# Altium PCB 单管放大电路.PcbDoc
Units mil, origin at the board's own origin, x right, y up, seen from the top; angles counter-clockwise.
Board outline 1985 x 1375 mil, 2 copper layers (Top Layer, Bottom Layer); 11 components, 8 nets, 23 pads, 0 vias.
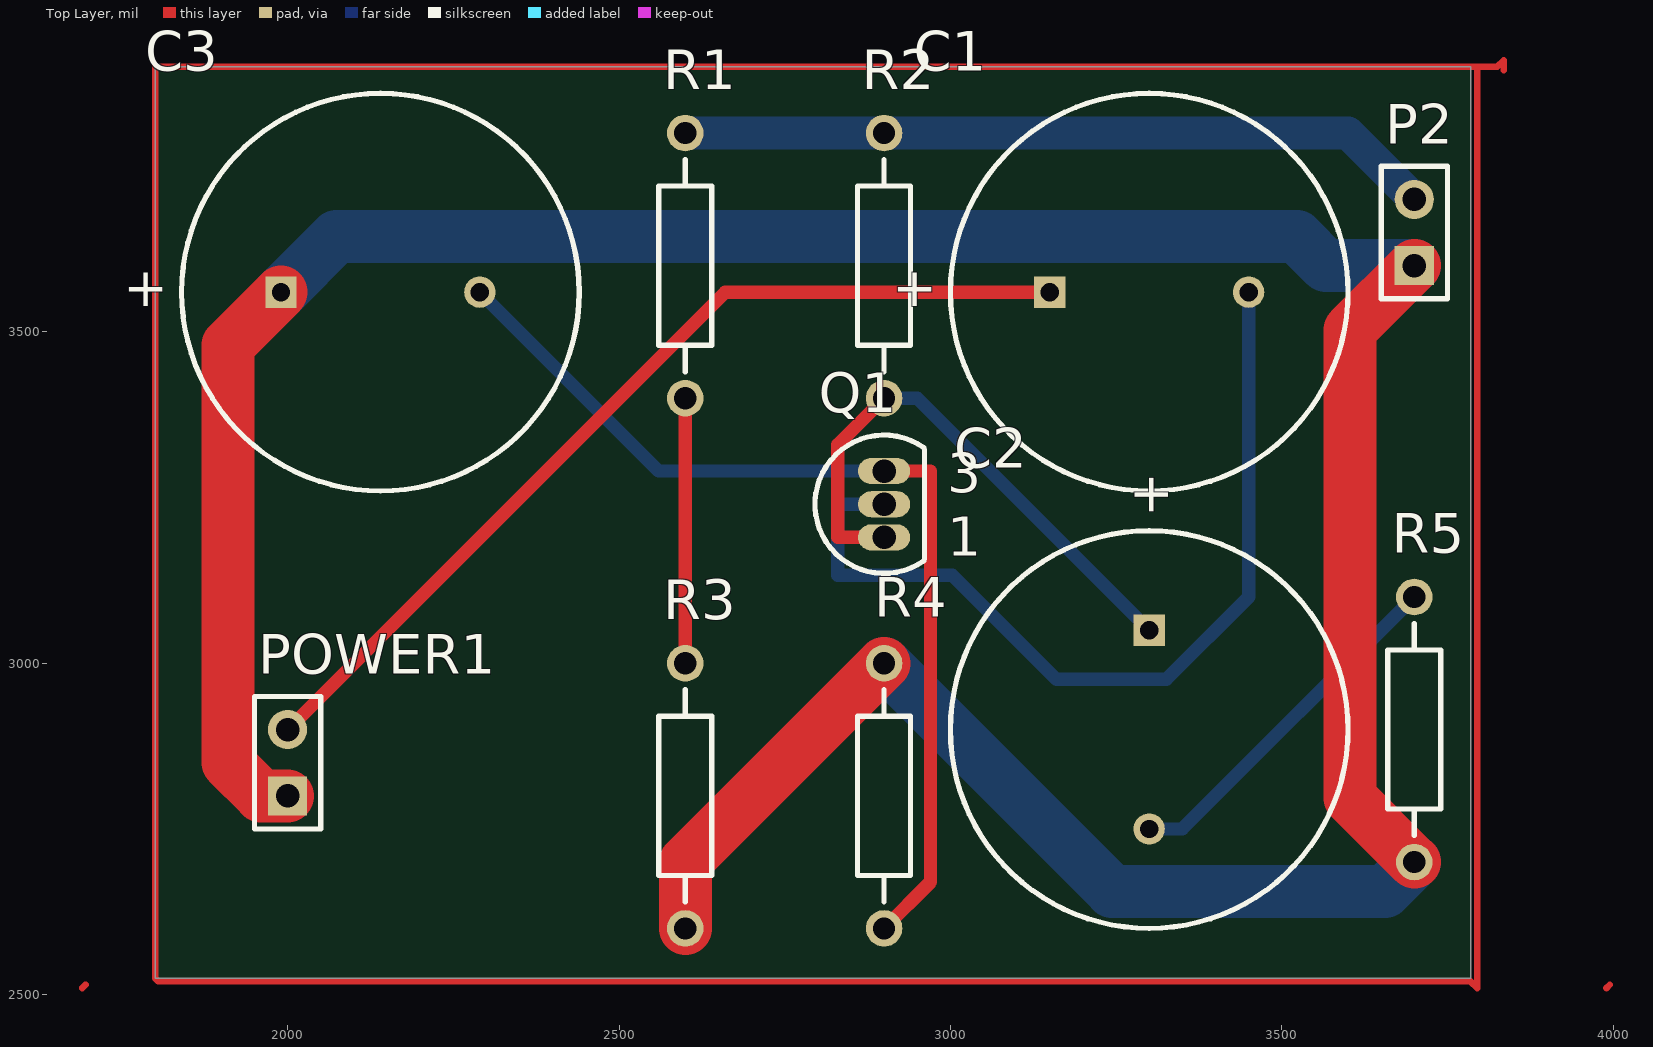
[diagram p0: Top Layer view]
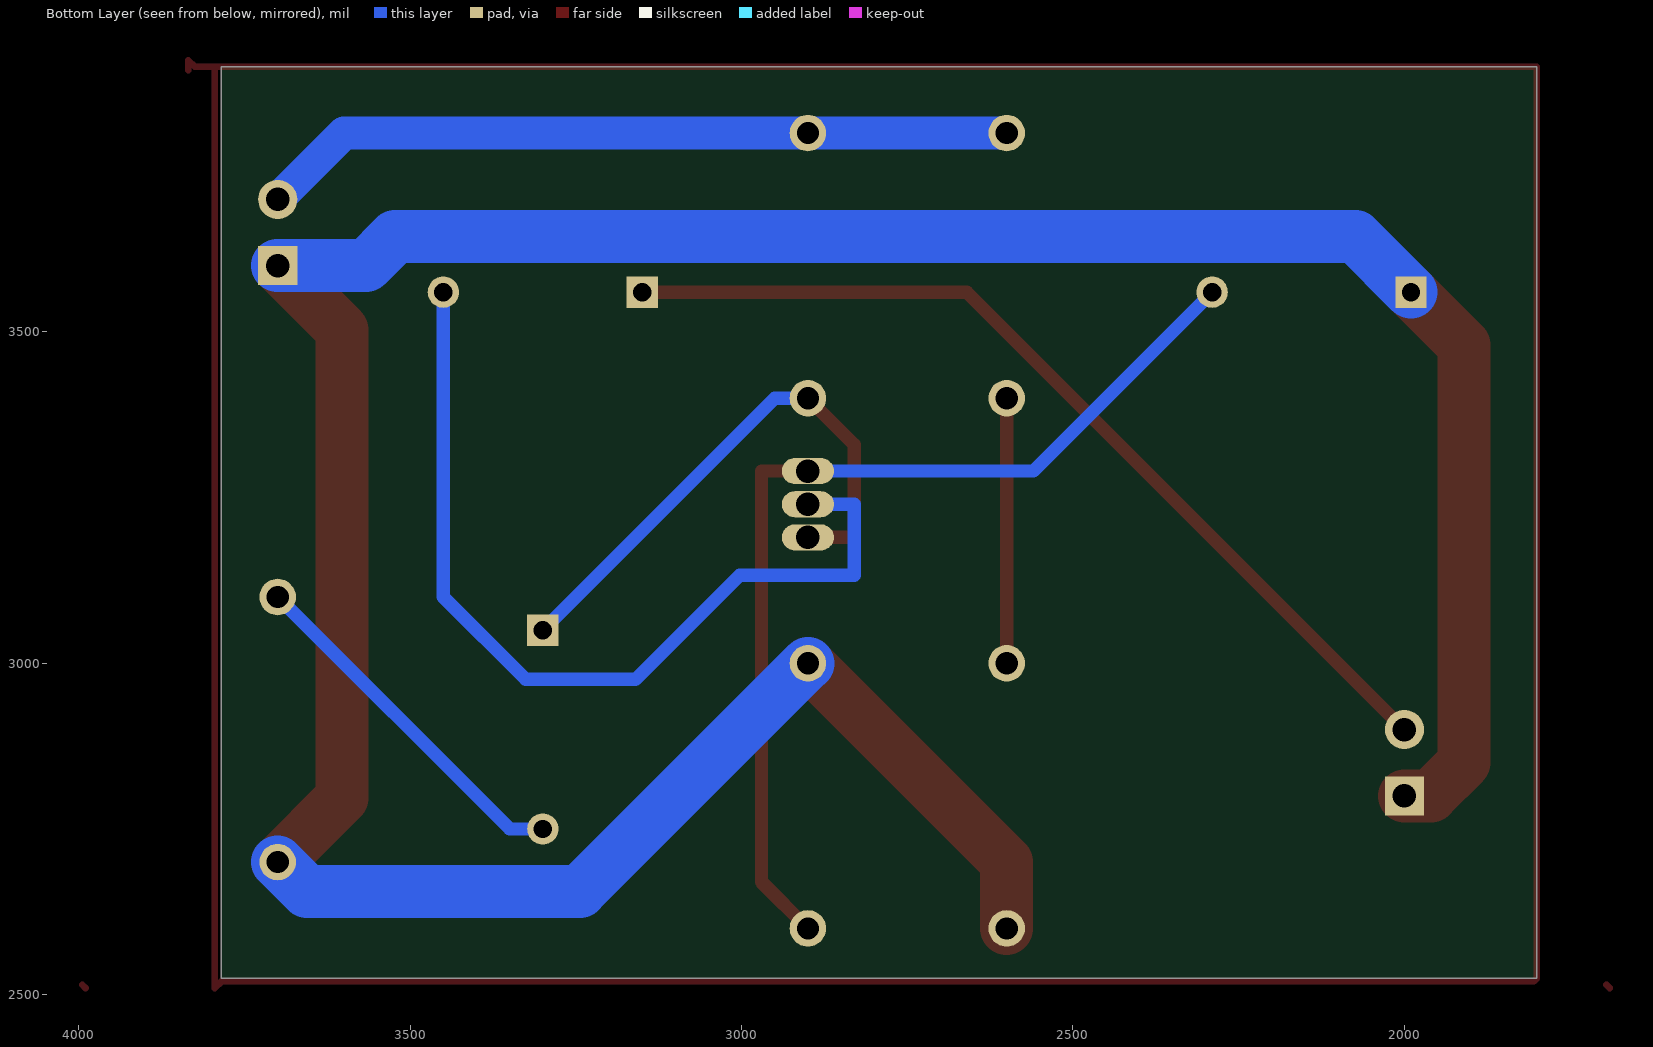
[diagram p1: Bottom Layer view, seen from below]

## Layer stack, top to bottom
Top Layer: signal copper 1.4
Dielectric: dielectric 12.6, FR-4, Dk 4.8
Bottom Layer: signal copper 1.4

## Board outline
1800,3900 1800,2525 3785,2525 3785,3900

## Design rules (kind name [scope] priority, off if disabled: settings)
Clearance [All] p1: gap=20
ComponentClearance [All] p1: gap=10 collisioncheckmode=0
PolygonConnect [All] p1: connectstyle=Relief reliefconductorwidth=10 reliefentries=4 polygonreliefangle="90 Angle"
RoomDefinition 单管放大电路 [InComponentClass('单管放大电路')] p1: confinementstyle=ConfineIn formatcopy=TRUE lockcomponents=FALSE outline 0,0 2000,0 2000,1000 0,1000
RoutingTopology [All] p1: topology=Horizontal
RoutingVias [All] p1: holewidth=28 width=50 viastyle="Through Hole" minholewidth=28 minwidth=50 maxholewidth=28 maxwidth=50
SolderMaskExpansion [All] p1: expansion=4
TestPointUsage [All] p1: valid=0 allowmultiple=FALSE
Testpoint [All] p1: side=15 testpointundercomponent=TRUE minsize=40 maxsize=100 preferedsize=60 minholesize=0 maxholesize=40 preferedholesize=32 testpointgrid=1 style=1023 order=-539222988
Width GNC [InNet('GND')] p1: maxlimit=80 minlimit=80 preferedwidth=80
Width VCC [InNet('VCC')] p2: maxlimit=50 minlimit=50 preferedwidth=50
Width [All] p3: maxlimit=20 minlimit=20 preferedwidth=20
16 further rules are at their usual default settings.

## Components (designator, comment, footprint, x,y, rotation, side; value= is the part's Value field where it differs from the comment)
C1 "Cap" RB7.6-15 3300,3560 r180 top
C2 "4" RB7.6-15 3300,2900 r90 top
C3 "Cap" RB7.6-15 2140,3560 r180 top
P2 "CON2" HDR1X2 3700,3600 r90 top
POWER1 "CON1" HDR1X2 2000,2800 r90 top
Q1 "9013" BCY-W3 2900,3240 r0 top
R1 "Res2" AXIAL-0.4 2600,3600 r90 top
R2 "Res2" AXIAL-0.4 2900,3600 r90 top
R3 "Res2" AXIAL-0.4 2600,2800 r90 top
R4 "100" AXIAL-0.4 2900,2800 r90 top
R5 "Res2" AXIAL-0.4 3700,2900 r90 top

## Footprints (in the part's own frame and the unit in brackets; to place one, negate y for a bottom-side part, rotate by r counter-clockwise, add the part's x,y. Pads: shape width x height; smd on the part's side, far side on the other; paste and mask are expansions set on the pad)
AXIAL-0.4 [mm] "Resistor; 2 Leads"
  round 1.4 hole 0.85: 1(-5.08,0) 2(5.08,0)
  silkscreen extent -4.06,-1.02 4.06,1.02
BCY-W3 [mm] "TO, Flat Index; 3 In-Line, Axial Leads; Body Dia. 4.8mm"
  oval 2x1 hole 0.9: 1(0,-1.27) 2(0,0) 3(0,1.27)
  silkscreen extent -2.65,-2.65 1.55,2.65
HDR1X2 [mm] "Connector; Header; 2 Position"
  rect 1.5x1.5 hole 0.9: 1(0,0)
  round 1.5 hole 0.9: 2(2.54,0)
  silkscreen extent -1.27,-1.27 3.81,1.27
RB7.6-15 [mm] "Polarized Capacitor (Radial); 2 Leads"
  rect 1.2x1.2 hole 0.7: 1(3.81,0)
  round 1.2 hole 0.7: 2(-3.81,0)
  silkscreen extent -7.62,-7.62 7.62,7.62

## Part data
C1 C3: "Capacitor"
C2: library part Cap, "Capacitor"
P2 POWER1: library part "Header 2", "Header, 2-Pin"
Q1: library part NPN, "NPN Bipolar Transistor"
R1 R2 R3 R5: "Resistor"
R4: library part Res2, "Resistor"

## Nets (pads, with @x,y where several pads share a name; then routed paths per layer and width w, separated by ;. In a path a pad name is that pad's centre, name@x,y a point inside that pad or via, vN(x,y) a via of type N, cw(c..) or ccw(c..) an arc to the next point about the centre after c; other vN are vias at no path point)
GND: C3.1 P2.1 POWER1.1 R3.1 R4.2 R5.1 | length 5081.9
  Top Layer w80: C3.1 1910,3480 1910,2850 1960,2800 POWER1.1 ; R3.1 2600,2700 R4.2 ; R5.1 3603,2797 3603,3503 P2.1
  Bottom Layer w80: C3.1 2073.62,3643.62 3523,3643.62 3566.62,3600 P2.1 ; R4.2 3244,2656 3656,2656 R5.1
NetC1_1: C1.1 POWER1.2 | length 1423.4
  Top Layer w20: POWER1.2 2660,3560 C1.1
NetC1_2: C1.2 Q1.2 | length 1373.4
  Bottom Layer w20: Q1.2 2830,3240 2830,3133 3003,3133 3160,2976 3326,2976 3450,3100 C1.2
NetC2_1: C2.1 Q1.1 R2.1 | length 854
  Top Layer w20: Q1.1 2830,3190 2830,3330 R2.1
  Bottom Layer w20: R2.1 2950,3400 C2.1
NetC2_2: C2.2 R5.2 | length 545
  Bottom Layer w20: C2.2 3350,2750 R5.2
NetC3_2: C3.2 Q1.3 R4.1 | length 1510.8
  Top Layer w20: R4.1 2970,2670 2970,3290 Q1.3
  Bottom Layer w20: C3.2 2560,3290 Q1.3
NetR1_1: R1.1 R3.2 | length 400
  Top Layer w20: R3.2 R1.1
VCC: P2.2 R1.2 R2.2 | length 1141.4
  Bottom Layer w50: R1.2 R2.2 3600,3800 P2.2
copper on no net: | length 6834.5
  Top Layer w10: 1690,2510 1695,2515 ; 3795,3900 3795,2510 3785,2520 1805,2520 1800,2525 1800,3900 3825,3900 3835,3910 3835,3895 ; 3990,2510 3995,2515

## Text inside footprints (layer, text, board x,y; h text height)
C1: Top Overlay "+" at 2979.85,3589.01 h59.06 r180
C2: Top Overlay "+" at 3329.01,3220.15 h59.06 r90
C3: Top Overlay "+" at 1819.85,3589.01 h59.06 r180
Q1: Top Overlay "1" at 2995.32,3162.09 h59.05; Top Overlay "3" at 2995.32,3258.39 h59.05